# Altium PCB PowerMergeBoard.PcbDoc
Units mil, origin at the board's own origin, x right, y up, seen from the top; angles counter-clockwise.
Board outline 3659.71 x 2810 mil, 4 copper layers (Top Layer, Signal Layer 1, Internal Plane 1, Bottom Layer), stack 30.634 mil thick; 97 components, 47 nets, 440 pads, 400 vias.
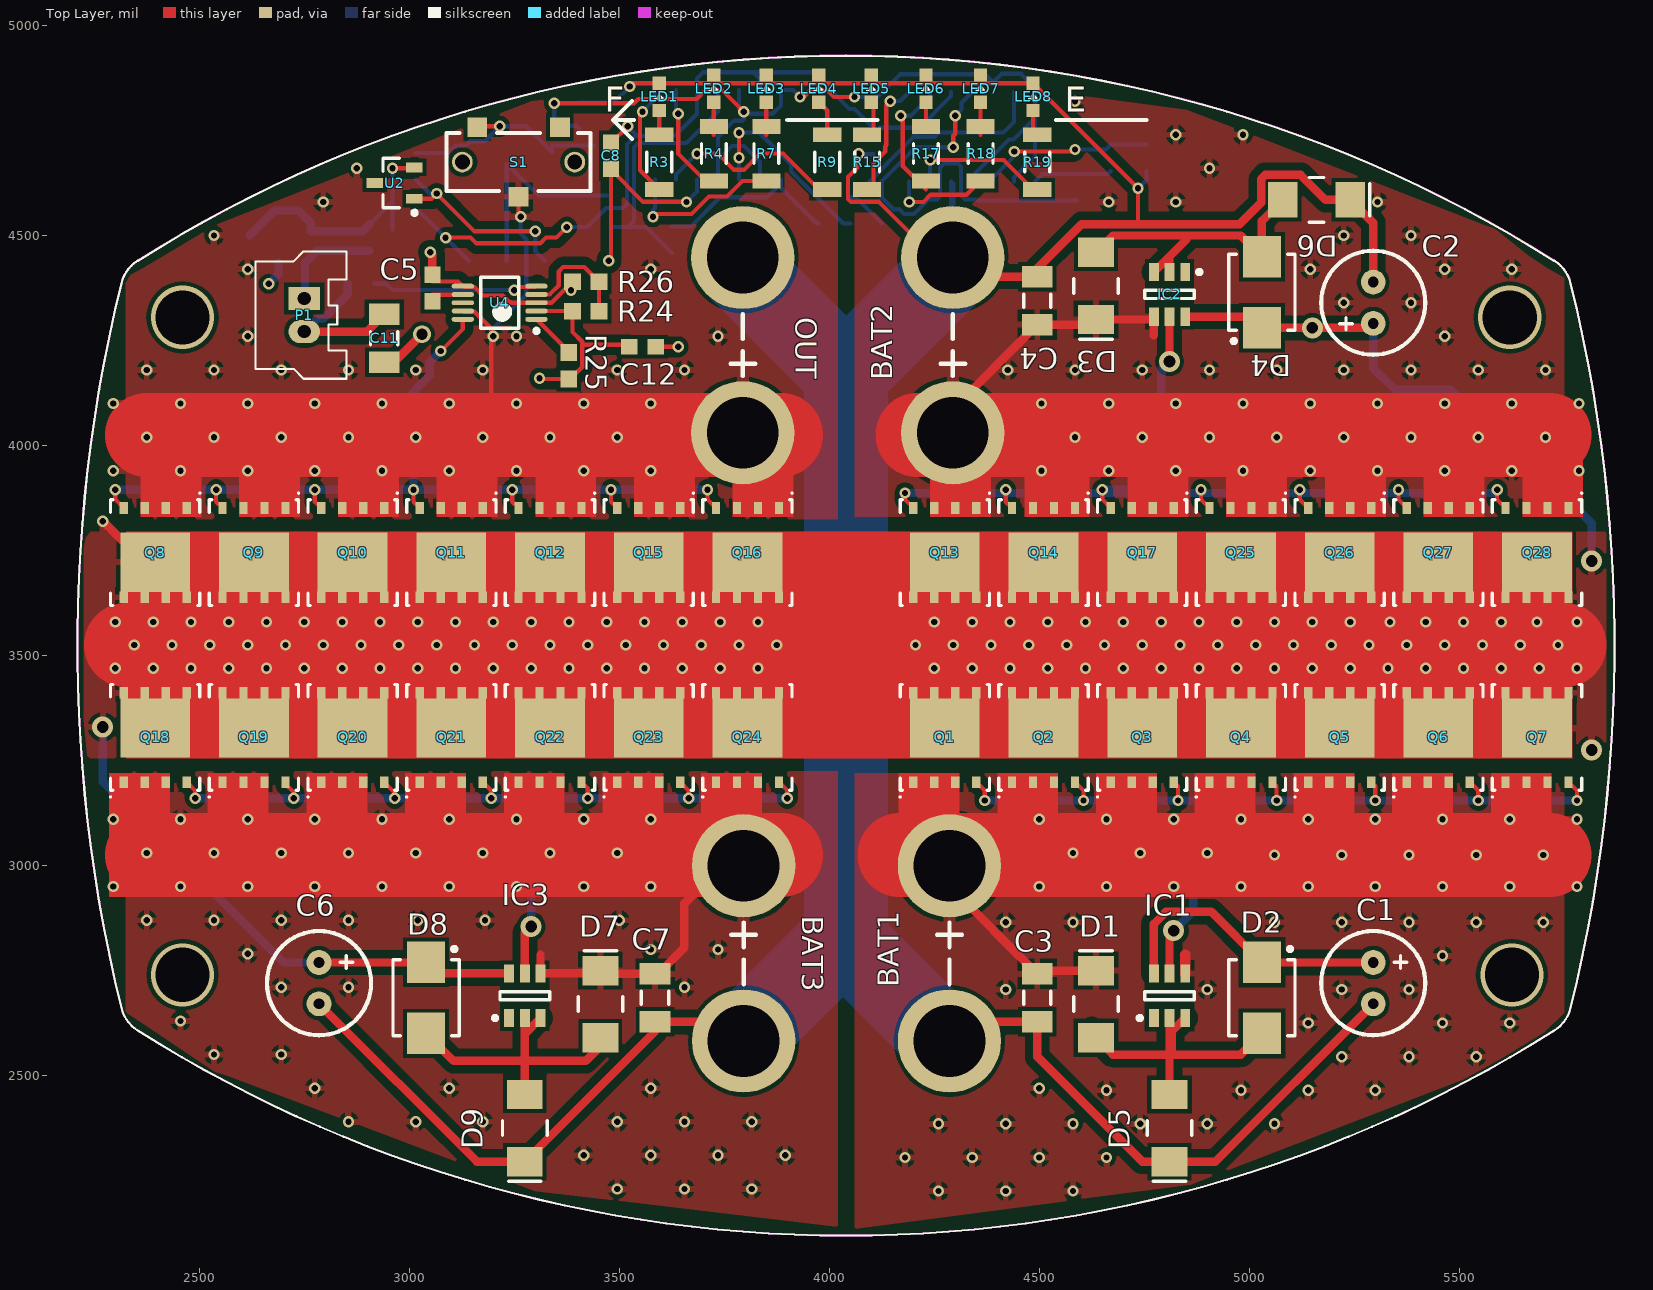
[diagram p0: Top Layer view]
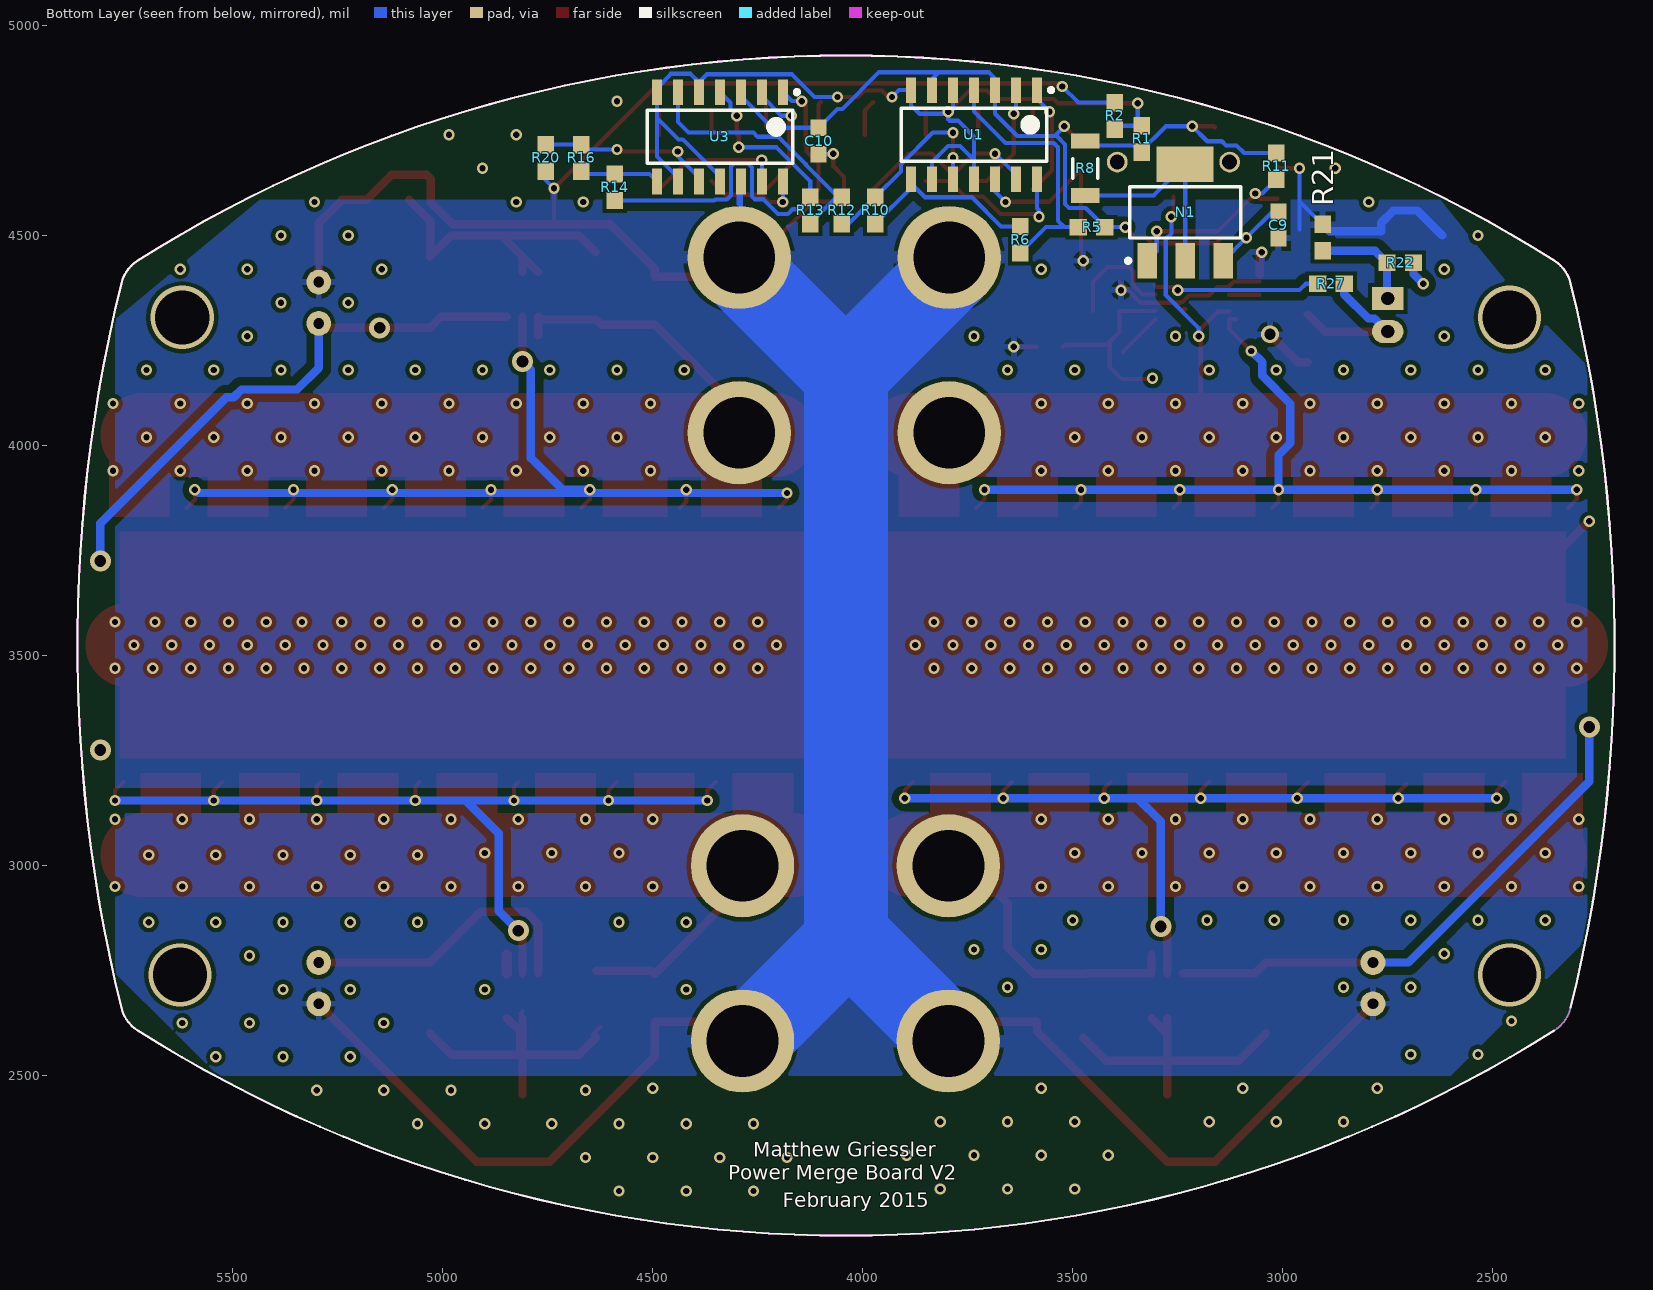
[diagram p1: Bottom Layer view, seen from below]
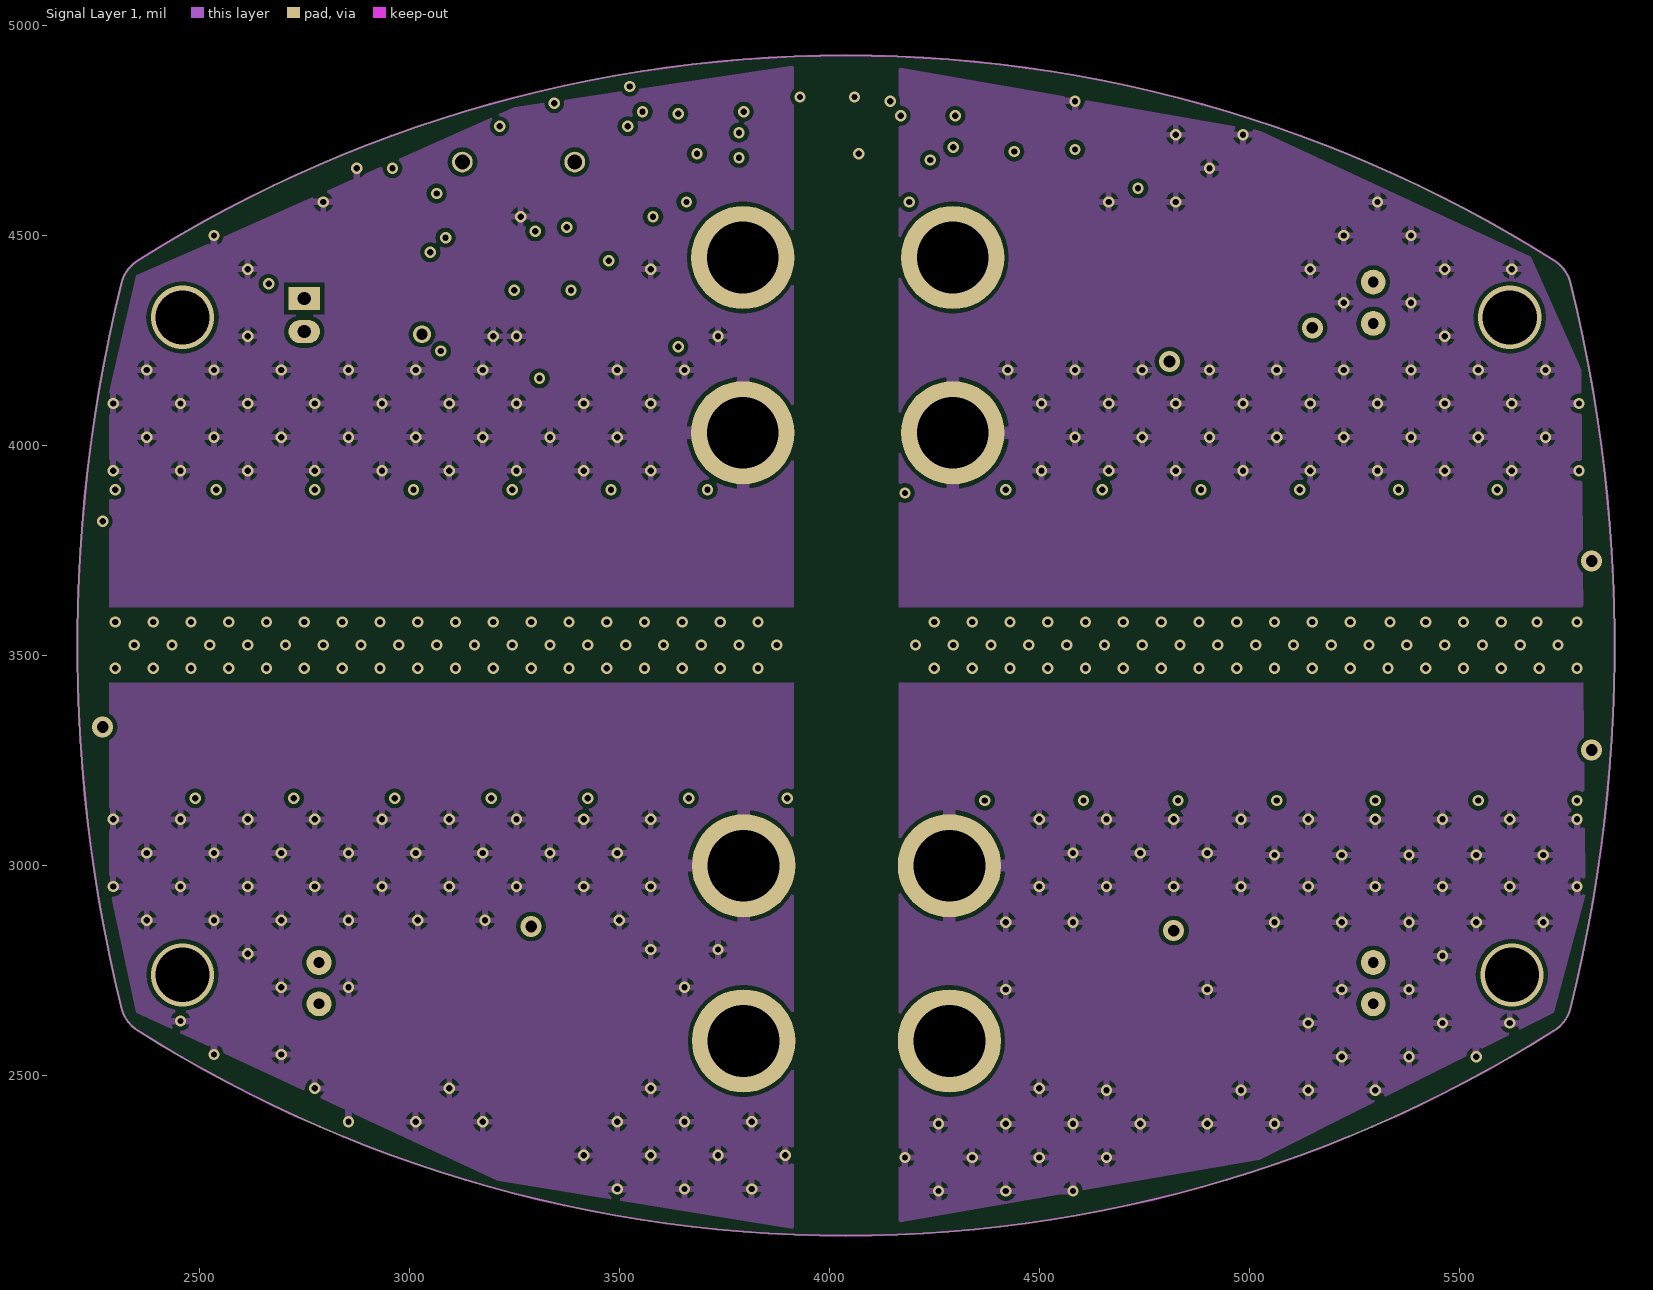
[diagram p2: Signal Layer 1]
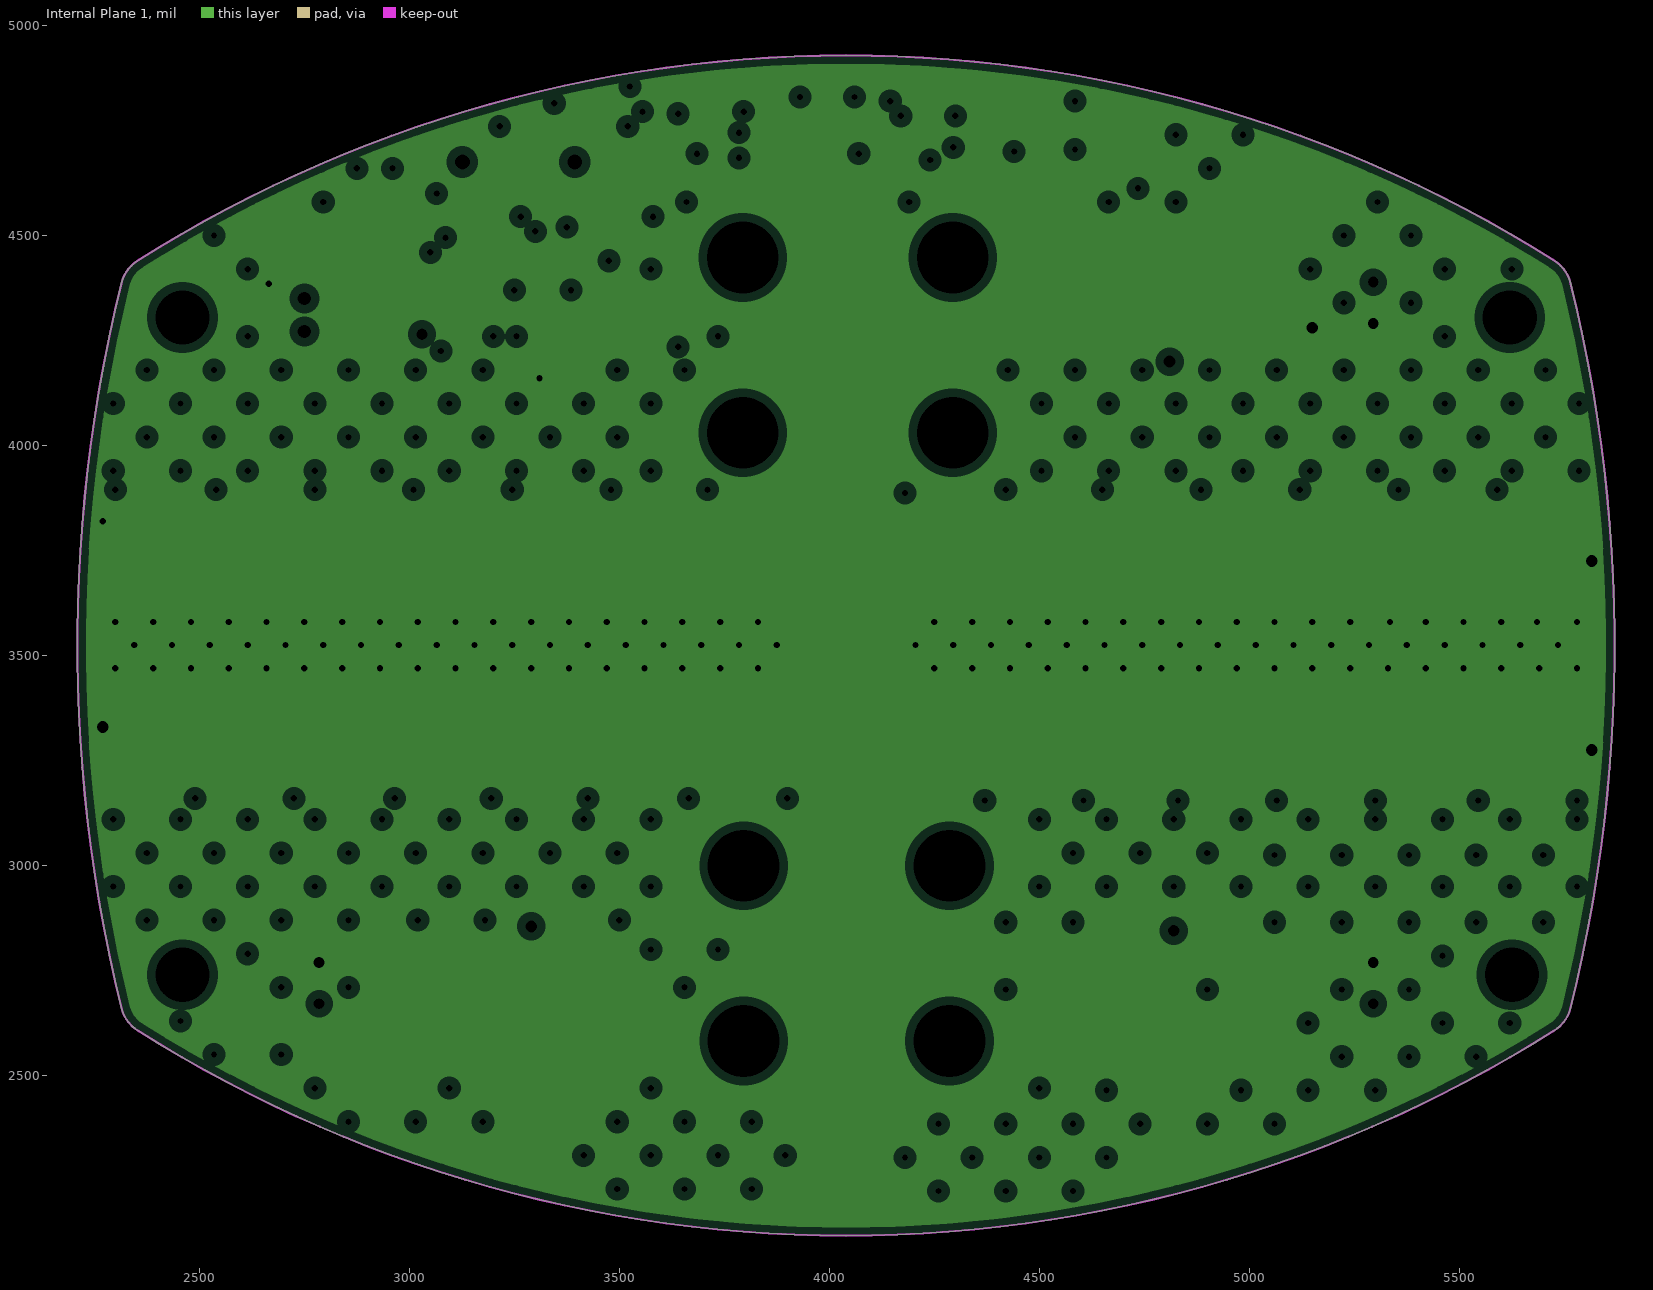
[diagram p3: Internal Plane 1, clearances drawn from the general rule]

## Layer stack, top to bottom
Top Solder: solder mask 0.4, Solder Resist, Dk 3.5
Top Layer: signal copper 1.4
Dielectric 1: core 10, FR-4, Dk 4.2
Signal Layer 1: signal copper 1.417
Dielectric 4: prepreg 5, Dk 4.2
Internal Plane 1: plane copper 1.417, net RAIL+
Dielectric 3: core 10, Dk 4.2
Bottom Layer: signal copper 1.4
Bottom Solder: solder mask 0.4, Solder Resist, Dk 3.5

## Board outline
2314.27,2661.67 cw(c5814.67,3523.79) 2314.27,4385.9 cw(c2401.66,4364.37) 2353.56,4440.44 cw(c4039.67,1773.79) 5725.78,4440.44 cw(c5677.68,4364.37) 5765.07,4385.9 cw(c2264.67,3523.79) 5765.07,2661.67 cw(c5677.68,2683.2) 5725.78,2607.13 cw(c4039.67,5273.79) 2353.56,2607.13 cw(c2401.66,2683.2)

## Design rules (kind name [scope] priority, off if disabled: settings)
Clearance [All] p1: gap=10 except(5: Arc-Track Arc-Poly SMDPad-SMDPad; 7: Track-Track Track-SMDPad; 20: Track-Poly)
HoleSize [All] p1: absolutevalues=TRUE maxlimit=171 minlimit=1 maxpercent=80.000 minpercent=20.000
MinimumAnnularRing [All] p1: minimumring=5
MinimumSolderMaskSliver [All] p1: minsoldermaskwidth=4
PlaneClearance [All] p1: clearance=20
PlaneConnect [All] p1: planeconnectstyle=Relief reliefexpansion=10 reliefentries=4 reliefconductorwidth=20 reliefairgap=10
PolygonConnect [HasFootprint('BATWIRE10')] p1: connectstyle=Relief reliefconductorwidth=30 reliefentries=4 polygonreliefangle="90 Angle" airgapwidth=10
PolygonConnect PolygonConnect_1 [All] p2: connectstyle=Relief reliefconductorwidth=15 reliefentries=4 polygonreliefangle="90 Angle" airgapwidth=10
RoutingVias [All] p1: holewidth=28 width=50 viastyle="Through Hole" minholewidth=15 minwidth=27 maxholewidth=28 maxwidth=50
SilkToSilkClearance [All] p1: silktosilkclearance=0
SilkToSolderMaskClearance [IsPad] p1: minsilkscreentomaskgap=5 clearancetoexposedcopper=TRUE
SolderMaskExpansion RailMask [(InNet('RAILOUT') OR InNet('Rail+') OR InNet('BAT1') OR InNet('BAT2') OR InNet('BAT3'))] p1: expansion=-5
SolderMaskExpansion [All] p2: expansion=4
Width Gnd [InNet('GND')] p1: maxlimit=200 minlimit=10 preferedwidth=10
Width RailOut [InNet('RAILOUT')] p2: maxlimit=200 minlimit=10 preferedwidth=200
Width Rail [InNet('RAIL+')] p3: maxlimit=200 minlimit=10 preferedwidth=200
Width Bat [(InNet('BAT1') OR InNet('BAT2') OR InNet('BAT3'))] p4: maxlimit=200 minlimit=10 preferedwidth=200
Width [All] p5: maxlimit=20 minlimit=10 preferedwidth=10
24 further rules are at their usual default settings.

## Classes and differential pairs
component class Battery3: C6 C7 D7 D8 D9 IC3 Q18 Q19 Q20 Q21 Q22 Q23 Q24
component class Battery2: C2 C4 D3 D4 D6 IC2 Q13 Q14 Q17 Q25 Q26 Q27 Q28
component class Battery1: C1 C3 D1 D2 D5 IC1 Q1 Q2 Q3 Q4 Q5 Q6 Q7
component class PowerMergeBoard: BAT1 BAT2 BAT3 C5 C11 C12 OUT P1 Q8 Q9 Q10 Q11 Q12 Q15 Q16 R21 R22 R24 R25 R26 R27 U4
component class FuelGauge: C8 C9 C10 LED1 LED2 LED3 LED4 LED5 LED6 LED7 LED8 N1 R1 R2 R3 R4 R5 R6 R7 R8 R9 R10 R11 R12 R13 R14 R15 R16 R17 R18 R19 R20 S1 U1 U2 U3

## Components (designator, comment, footprint, x,y, rotation, side; value= is the part's Value field where it differs from the comment)
BAT1 "BATWIRE" BATWIRE10 4285,2790 r270 top
BAT2 "BATWIRE" BATWIRE10 4295,4240 r90 top
BAT3 "BATWIRE" BATWIRE10 3795,2790 r270 top
C1 "CapPol" CAP22uF100V 5295,2720 r270 top
C2 "CapPol" CAP22uF100V 5295,4340 r90 top
C3 "Cap" CAPC1206 4495,2685 r270 top
C4 "Cap" CAPC1206 4495,4345 r90 top
C5 "Cap" CAPC0603 3055,4375 r90 top
C6 "CapPol" CAP22uF100V 2785,2720 r270 top
C7 "Cap" CAPC1206 3585,2685 r270 top
C8 "Cap" CAPC0603 3480,4690 r270 top
C9 "Cap" CAPC0603 3010,4525 r270 bottom
C10 "Cap" CAPC0603 4105,4725 r270 bottom
C11 "Cap" CAPC1206 2940,4255 r270 top
C12 "Cap" CAPC0603 3555,4235 r180 top
D1 "Schottky" SS110-TP 4635,2670 r270 top
D2 "SMBJ100A-13-F" SMBJ100A-13-F 5030,2685 r270 top
D3 "Schottky" SS110-TP 4635,4380 r90 top
D4 "SMBJ100A-13-F" SMBJ100A-13-F 5030,4365 r90 top
D5 "Schottky" SS110-TP 4810,2375 r90 top
D6 "Schottky" SS110-TP 5160,4585 r180 top
D7 "Schottky" SS110-TP 3455,2670 r270 top
D8 "SMBJ100A-13-F" SMBJ100A-13-F 3040,2685 r270 top
D9 "Schottky" SS110-TP 3275,2375 r90 top
IC1 "LM5050MK-2/NOPB" LM5050MK-2/NOPB 4810,2690 r90 top
IC2 "LM5050MK-2/NOPB" LM5050MK-2/NOPB 4810,4360 r270 top
IC3 "LM5050MK-2/NOPB" LM5050MK-2/NOPB 3275,2690 r90 top
LED1 "LED" LED0603 3595,4830 r90 top
LED2 "LED" LED0603 3725,4850 r90 top
LED3 "LED" LED0603 3850,4850 r90 top
LED4 "LED" LED0603 3975,4850 r90 top
LED5 "LED" LED0603 4100,4850 r90 top
LED6 "LED" LED0603 4230,4850 r90 top
LED7 "LED" LED0603 4360,4850 r90 top
LED8 "LED" LED0603 4485,4830 r90 top
N1 "NPNBJT" PZT3904 3232.05,4555 r90 bottom
OUT "BATWIRE" BATWIRE10 3795,4240 r90 top
P1 "2-pin Vert Sherlock" MOLEX-HDR-1X2-SHERLOCK-VERT 2750,4350 r90 top
Q1 "CSD19502Q5B" CSD19502Q5B 4275,3305 r90 top
Q2 "CSD19502Q5B" CSD19502Q5B 4510,3305 r90 top
Q3 "CSD19502Q5B" CSD19502Q5B 4745,3305 r90 top
Q4 "CSD19502Q5B" CSD19502Q5B 4980,3305 r90 top
Q5 "CSD19502Q5B" CSD19502Q5B 5215,3305 r90 top
Q6 "CSD19502Q5B" CSD19502Q5B 5450,3305 r90 top
Q7 "CSD19502Q5B" CSD19502Q5B 5685,3305 r90 top
Q8 "CSD19502Q5B" CSD19502Q5B 2395,3745 r270 top
Q9 "CSD19502Q5B" CSD19502Q5B 2630,3745 r270 top
Q10 "CSD19502Q5B" CSD19502Q5B 2865,3745 r270 top
Q11 "CSD19502Q5B" CSD19502Q5B 3100,3745 r270 top
Q12 "CSD19502Q5B" CSD19502Q5B 3335,3745 r270 top
Q13 "CSD19502Q5B" CSD19502Q5B 4275,3745 r270 top
Q14 "CSD19502Q5B" CSD19502Q5B 4510,3745 r270 top
Q15 "CSD19502Q5B" CSD19502Q5B 3570,3745 r270 top
Q16 "CSD19502Q5B" CSD19502Q5B 3805,3745 r270 top
Q17 "CSD19502Q5B" CSD19502Q5B 4745,3745 r270 top
Q18 "CSD19502Q5B" CSD19502Q5B 2395,3305 r90 top
Q19 "CSD19502Q5B" CSD19502Q5B 2630,3305 r90 top
Q20 "CSD19502Q5B" CSD19502Q5B 2865,3305 r90 top
Q21 "CSD19502Q5B" CSD19502Q5B 3100,3305 r90 top
Q22 "CSD19502Q5B" CSD19502Q5B 3335,3305 r90 top
Q23 "CSD19502Q5B" CSD19502Q5B 3570,3305 r90 top
Q24 "CSD19502Q5B" CSD19502Q5B 3805,3305 r90 top
Q25 "CSD19502Q5B" CSD19502Q5B 4980,3745 r270 top
Q26 "CSD19502Q5B" CSD19502Q5B 5215,3745 r270 top
Q27 "CSD19502Q5B" CSD19502Q5B 5450,3745 r270 top
Q28 "CSD19502Q5B" CSD19502Q5B 5685,3745 r270 top
R1 "Res" RES0603 3335,4730 r90 bottom
R2 "Res" RES0603 3400,4785 r90 bottom
R3 "Res" RES1206 3595,4675 r90 top
R4 "Res" RES1206 3725,4695 r90 top
R5 "Res" RES0603 3455,4520 r0 bottom
R6 "Res" RES0603 3625,4490 r90 bottom
R7 "Res" RES1206 3850,4695 r90 top
R8 "Res" RES1206 3470,4660 r90 bottom
R9 "Res" RES1206 3995,4675 r90 top
R10 "Res" RES0603 3970,4560 r90 bottom
R11 "Res" RES0603 3015,4665 r270 bottom
R12 "Res" RES0603 4050,4560 r90 bottom
R13 "Res" RES0603 4125,4560 r90 bottom
R14 "Res" RES0603 4590,4615 r90 bottom
R15 "Res" RES1206 4090,4675 r90 top
R16 "Res" RES0603 4670,4685 r90 bottom
R17 "Res" RES1206 4230,4695 r90 top
R18 "Res" RES1206 4360,4695 r90 top
R19 "Res" RES1206 4495,4675 r90 top
R20 "Res" RES0603 4755,4685 r270 bottom
R21 "Res" RES0603 2905,4495 r90 bottom
R22 "Res" RES0603 2720,4435 r0 bottom
R24 "Res" RES0603 3420,4320 r0 top
R25 "Res" RES0603 3380,4190 r90 top
R26 "Res" RES0603 3420,4390 r180 top
R27 "Res" RES0603 2885,4385 r0 bottom
S1 "SPDT Slide Switch" CL-SB-12B-01T 3260,4675 r180 top
U1 "LM339" LM339 3735,4740 r270 bottom
U2 "LM4040" LM4040 2965,4625 r180 top
U3 "LM339" LM339 4340,4735 r270 bottom
U4 "LM5060" LM5060 3215,4340 r180 top

## Footprints (in the part's own frame and the unit in brackets; to place one, negate y for a bottom-side part, rotate by r counter-clockwise, add the part's x,y. Pads: shape width x height; smd on the part's side, far side on the other; paste and mask are expansions set on the pad)
BATWIRE10 [mil] "Two 10AWG wires soldered directly to the board"
  round 246 hole 171: +(-209.65,0.98) -(207.68,0.98)
  silkscreen extent -75,-29 73,31
CAP22uF100V [mm] "CAP ALUM 22UF 100V 20% RADIAL"
  round 1.5 hole 0.65: 1(-1.25,0) 2(1.25,0)
  silkscreen extent -3.15,-3.15 3.15,3.15, body extent -3.13,-3.14 3.15,3.14, height 11.2
CAPC0603 [mm] "Chip Capacitor, 2-Leads, Body 1.60x0.80mm, IPC Medium Density"
  rect 1x0.95 smd: 1(-0.8,0) 2(0.8,0)
  body extent -0.88,-0.48 0.87,0.48, height 0.8
CAPC1206 [mm] "Chip Capacitor, 2-Leads, Body 3.20x1.60mm, IPC Medium Density"
  rect 1.3x1.85 smd: 1(-1.45,0) 2(1.45,0)
  silkscreen extent -0.4,-0.82 0.4,0.82, body extent -1.7,-0.9 1.7,0.9, height 1.8
CL-SB-12B-01T [mm] "SWITCH SLIDE SPDT 200MA 12V"
  round 1.256 hole 0.9 paste+0 mask+0: 0(-3.4,0) 0(3.4,0)
  rect 1.2x1.2 smd: 1(-2.5,-2.1) 2(0,2.1) 3(2.5,-2.1)
  silkscreen extent -4.35,-1.75 4.35,1.75, body extent -4.25,-2.5 4.25,2.5, height 5.5
CSD19502Q5B [mm] "PSON, 8-Leads, Body 5.00x6.00mm, Pitch 1.27mm, Thermal Pad 4.22x3.58mm, IPC Medium Density"
  rect 3.58x4.22 smd mask+0: D(0.575,0)
  rect 0.7x0.5 smd mask+0: D(2.7,-1.905) D(2.7,-0.635) D(2.7,0.635) D(2.7,1.905) G(-2.7,-1.905) S(-2.7,-0.635) S(-2.7,0.635) S(-2.7,1.905)
  silkscreen extent -3.65,-2.7 3.2,2.75, body extent -3.05,-2.55 3.05,2.55, height 1.05
LED0603 [mm] "Chip LED, 2-Leads, Body 1.60x0.80mm, IPC Medium Density"
  rect 0.8x0.8 smd: A(-0.825,0) C(0.825,0)
  silkscreen extent -0.13,-0.25 0.12,0.25, body extent -0.88,-0.48 0.87,0.47, height 0.8
LM339 [mm] "SOIC, 14-Leads, Body 8.65x3.90mm, Pitch 1.27mm, IPC Medium Density"
  rect 1.55x0.6 smd: 1(-2.7,3.81) 2(-2.7,2.54) 3(-2.7,1.27) 4(-2.7,0) 5(-2.7,-1.27) 6(-2.7,-2.54) 7(-2.7,-3.81) 8(2.7,-3.81) 9(2.7,-2.54) 10(2.7,-1.27) 11(2.7,0) 12(2.7,1.27) 13(2.7,2.54) 14(2.7,3.81)
  silkscreen extent -2.82,-4.4 1.6,4.78, body extent -2,-4.4 2,4.4, height 1.75
LM4040 [mm] "SOT23, 3-Leads, Body 2.92x2.37mm, Pitch 0.95mm, IPC Medium Density"
  rect 1x0.6 smd: 1(-1.2,0.95) 2(-1.2,-0.95) 3(1.2,0)
  silkscreen extent -1.33,-1.5 0.7,1.92, body extent -0.7,-1.52 0.7,1.52, height 1.12
LM5050MK-2/NOPB [mm] "IC OR CTRLR N+1 6SOT"
  rect 1.1x0.6 smd: 1(-1.35,0.95) 2(-1.35,0) 3(-1.35,-0.95) 4(1.35,-0.95) 5(1.35,0) 6(1.35,0.95)
  silkscreen extent -1.47,-1.5 0.25,1.92, body extent -0.87,-1.52 0.87,1.53, height 1.1
LM5060 [mm] "10-VSSOP"
  oval 1.35x0.3 smd: 1(-2.225,1) 2(-2.225,0.5) 3(-2.225,0) 4(-2.225,-0.5) 5(-2.225,-1) 6(2.225,-1) 7(2.225,-0.5) 8(2.225,0) 9(2.225,0.5) 10(2.225,1)
  silkscreen extent -2.35,-1.55 1.15,1.82, body extent -1.55,-1.55 1.55,1.55, height 1.1
MOLEX-HDR-1X2-SHERLOCK-VERT [mm]
  rect 1.397x1.905 hole 0.8: 1(0,0)
  oval 1.397x1.905 hole 0.8: 2(-2,0)
  silkscreen extent -4.85,-2.55 2.85,2.95, body extent -4.87,-2.59 2.83,2.96, height 8.5
PZT3904 [mm] "SOT223, 4-Leads, Body 6.45x7.00mm (avg), Pitch 2.30mm, IPC Medium Density"
  rect 2.15x1.2 smd: B(-2.925,2.3) C(-2.925,0) E(-2.925,-2.3)
  rect 2.15x3.45 smd: C(2.925,0)
  silkscreen extent -3.05,-3.35 1.55,3.58, body extent -1.85,-3.35 1.85,3.35, height 1.8
RES0603 [mm] "Chip Resistor, 2-Leads, Body 1.60x0.80mm, IPC Medium Density"
  rect 1.05x1 smd: 1(-0.8,0) 2(0.8,0)
  body extent -0.88,-0.48 0.87,0.47, height 0.8
RES1206 [mm] "Chip Resistor, 2-Leads, Body 3.20x1.60mm, IPC Medium Density"
  rect 0.9x1.7 smd: 1(-1.65,0) 2(1.65,0)
  silkscreen extent -0.6,-0.75 0.6,0.75, body extent -1.73,-0.87 1.73,0.88, height 0.7
SMBJ100A-13-F [mm] "TVS DIODE 100VWM 162VC SMB"
  rect 2.5x2.3 smd: A(2.15,0) C(-2.15,0)
  silkscreen extent -3.07,-2 2.3,2, body extent -2.29,-1.97 2.28,1.97, height 2.62
SS110-TP [mil] "DIODE SCHOTTKY 100V 1A SMA"
  rect 70x85 smd: A(80,0) C(-80,0)
  silkscreen extent -127,-53 18,53, body extent -84,-52 84,52, height 116

## Part data
BAT1 BAT2 BAT3 OUT: "Two large gauge leads soldered directly to the board."
D1 D3 D5 D6 D7 D9: "Schottky Diode Template"
D2 D4 D8: "TVS DIODE 100VWM 162VC SMB"
IC1 IC2 IC3: "IC OR CTRLR N+1 6SOT"
N1: "NPN Transistor Template"
P1: library part MOLEX-HDR-1x2-SHERLOCK_VERT, "Header, Molex, 2mm Pitch Sherlock Header, Single Row, Vertical, 2 Circuits, Length 3.3mm, 0353620250"
Q1 Q2 Q3 Q4 Q5 Q6 Q7 Q8 Q9 Q10 Q11 Q12 Q13 Q14 Q15 Q16 Q17 Q18 Q19 Q20 Q21 Q22 Q23 Q24 Q25 Q26 Q27 Q28: "NEXFET Power MOSFET"
U1 U3: "IC QUAD DIFF COMPARATOR 14-TSSOP"
U2: "LM4040AIM3-10.0/NOPBCT"
U4: "Hotswap Controller"

## Via types
v1: diameter 27, hole 15, Top Layer to Bottom Layer, tented bottom, 215 vias
v2: diameter 27, hole 15, Top Layer to Bottom Layer, tented both sides, 173 vias
v3: diameter 50, hole 28, Top Layer to Bottom Layer, tented both sides, 7 vias
v4: diameter 150, hole 129, Top Layer to Bottom Layer, 2 vias
v5: diameter 151, hole 129, Top Layer to Bottom Layer, 2 vias
v6: diameter 42, hole 27, Top Layer to Bottom Layer, tented both sides, 1 vias

## Nets (pads, with @x,y where several pads share a name; then routed paths per layer and width w, separated by ;. In a path a pad name is that pad's centre, name@x,y a point inside that pad or via, vN(x,y) a via of type N, cw(c..) or ccw(c..) an arc to the next point about the centre after c; other vN are vias at no path point)
BAT1: BAT1.+ C3.1 D1.C IC1.4 Q1.S Q2.S Q3.S Q4.S Q5.S Q6.S Q7.S | length 2110.5
  Top Layer w20: BAT1.+@4285,3030 4285,2952.09 C3.1 4502.91,2750 D1.C
  Top Layer w25: IC1.4 4847.4,2787.6
  Top Layer w200: BAT1.+@4167.11,3025 5715,3025
  other v1: 4500,2950 4660,2950 4820,2950 4980,2950 5140,2950 5300,2950 5460,2950 5620,2950 5780,2950 5060,3025 5220,3025 5380,3025 5540,3025 5700,3025 4580,3030 4740,3030 4900,3030 4500,3110 4660,3110 4820,3110 4980,3110 5140,3110 5300,3110 5460,3110 5620,3110 5780,3110
  other v2: 4260,2225 4420,2225 4580,2225 4180,2305 4340,2305 4500,2305 4660,2305 4260,2385 4420,2385 4580,2385 4740,2385 4900,2385 5060,2385 4660,2465 4980,2465 5140,2465 5300,2465 4500,2470 5220,2545 5380,2545 5540,2545 5140,2625 5460,2625 5620,2625 4420,2705 4900,2705 5220,2705 5380,2705 5460,2785 4420,2865 4580,2865 5060,2865 5220,2865 5380,2865 5540,2865 5700,2865
BAT2: BAT2.+ C4.1 D3.C IC2.4 Q13.S Q14.S Q17.S Q25.S Q26.S Q27.S Q28.S | length 2189.8
  Top Layer w20: BAT2.+@4285,4020 4285,4077.91 C4.1 4622.91,4287.91 D3.C 4765.75,4300 IC2.4 4772.6,4262.4
  Top Layer w200: BAT2.+@4210,4025 v1@5715,4025
  other v1: 4505,3940 4665,3940 4825,3940 4985,3940 5145,3940 5305,3940 5465,3940 5625,3940 5785,3940 4585,4020 4745,4020 4905,4020 5065,4020 5225,4020 5385,4020 5545,4020 5705,4020 4505,4100 4665,4100 4825,4100 4985,4100 5145,4100 5305,4100 5465,4100 5625,4100 5785,4100
  other v2: 4425,4180 4585,4180 4745,4180 4905,4180 5065,4180 5225,4180 5385,4180 5545,4180 5705,4180 5465,4260 5225,4340 5385,4340 5145,4420 5465,4420 5625,4420 5225,4500 5385,4500 4665,4580 4825,4580 5305,4580 4905,4660 4825,4740 4985,4740 4585,4820
BAT3: BAT3.+ C7.1 D7.C IC3.4 Q18.S Q19.S Q20.S Q21.S Q22.S Q23.S Q24.S | length 2205.3
  Top Layer w20: 3312.4,2787.6 IC3.4 3468.15,2743.15 3469.21,2742.09 C7.1 3592.09,2742.09 3655,2805 3655,2910 BAT3.+@3780,3035
  Top Layer w200: v1@2375,3025 BAT3.+@3885,3025
  other v1: 2295,2950 2455,2950 2615,2950 2775,2950 2935,2950 3095,2950 3255,2950 3415,2950 3575,2950 2375,3030 2535,3030 2695,3030 2855,3030 3015,3030 3175,3030 3335,3030 3495,3030 2295,3110 2455,3110 2615,3110 2775,3110 2935,3110 3095,3110 3255,3110 3415,3110 3575,3110
  other v2: 3495,2230 3655,2230 3815,2230 3415,2310 3575,2310 3735,2310 3895,2310 2855,2390 3015,2390 3175,2390 3495,2390 3655,2390 3815,2390 2775,2470 3095,2470 3575,2470 2535,2550 2695,2550 2455,2630 2695,2710 2855,2710 3655,2710 2615,2790 3575,2800 3735,2800 2375,2870 2535,2870 2695,2870 2855,2870 3020,2870 3180,2870 3500,2870
ENABLE: R27.2 U4.5 | length 399.6
  Top Layer w10: v2(3250,4370) 3257.59,4377.59 3300.82,4377.59 U4.5 U4.5@3305,4381.77
  Bottom Layer w10: R27.2 2945,4385 2960,4370 v2(3250,4370)
GAUGEPOWER: R1.1 R8.2 R11.1 S1.3 | length 546.3
  Top Layer w10: S1.3 3163.9,4760 v2(3215,4760)
  Bottom Layer w10: R11.1 3091.47,4696.5 3109.69,4714.72 3135.24,4714.72 3145,4724.48 3179.48,4724.48 v2(3215,4760) 3278.5,4760 3340,4698.5 3340,4714.72 R8.2@3438.94,4714.72
GND: BAT1.- BAT2.- BAT3.- C1.2 C2.2 C3.2 C4.2 C5.2 C6.2 C7.2 C8.2 C9.2 C10.2 C11.2 C12.1 D5.C D6.C D9.C LED1.C LED2.C LED3.C LED4.C LED5.C LED6.C LED7.C LED8.C OUT.- R2.2 R20.2 R21.2 R26.2 U1.12 U2.2 U3.12 U4.3 U4.6 | length 10667
  Top Layer w10: v2(2960,4660) 3009.84,4660 U2.2 ; C5.2@3055,4390.75 3116.02,4390.75 U4.6 3129.18,4377.59 3155.49,4377.59 3165.98,4367.1 3165.98,4366.02 3175,4357 3222.7,4357 3238.2,4341.5 3242.54,4341.5 3244.04,4340 U4.3 3338.5,4340 R26.2 ; v1(3475,4440) 3480,4445 C8.2@3480,4656.89 ; C8.2 C8.2@3480,4656.89 ; v2(3525,4855) 3532.48,4862.48 LED1.C LED8.C v2(4735,4612.48) 4735,4527 ; C12.1 v2(3640,4235) ; v2(3660,4580) 3659.68,4580.32 3556.56,4580.32 C8.2@3480,4656.89 ; v2(4070,4695) 4070,4665.22 4044.54,4639.76 4044.54,4587.35 4051.56,4580.32 4118.38,4580.32 BAT2.-@4285,4413.7
  Top Layer w20: C6.2 3160.79,2295 D9.C 3585,2605 C7.2 3778.39,2627.91 BAT3.-@3795,2611.3 ; C11.2 2962.91,4197.91 v6(3030,4265) ; v2(3050,4460) 3055,4455 C5.2 ; v1(3475,4440) v1@3475,4441.5 ; BAT1.-@4285,2636.3 4293.39,2627.91 C3.2 4495,2545 4745,2295 D5.C 4919.21,2295 C1.2 ; BAT2.-@4285,4413.7 4296.61,4402.09 C4.2 4495,4421.54 4600.46,4527 4735,4527 4977,4527 5028,4578 5028,4634.54 5037.96,4644.5 5122.04,4644.5 5181.54,4585 D6.C 5295,4530 C2.2
  Bottom Layer w10: R21.2 2960,4581.5 ; 2960,4515 2960,4581.5 ; v2(2960,4660) 2960,4581.5 ; R2.2@3405,4816.5 3486.5,4816.5 v2(3525,4855) ; v2(3660,4580) 3685,4605 U1.12 ; v2(4070,4695) 4071.5,4693.5 C10.2 ; BAT2.-@4294.02,4563.5 4290,4567.52 U3.12 4295,4623.7 4295,4575 ; v2(4735,4612.48) 4755,4632.48 R20.2
  Bottom Layer w20: 2620,4500 2679.53,4559.53 2736.3,4559.53 2765.32,4530.52 2765.32,4510 2888.5,4510 R21.2
  Bottom Layer w200: BAT3.-@3795,2580 3795,2590 4040,2835 ; OUT.-@3795,4413.7 4040,4168.7 ; BAT1.-@4280,2580 4040,2820 4040,4168.7 ; BAT2.-@4285,4413.7 4040,4168.7
  other v1: 3385,4370
NetC5_1: C5.1 U4.7 | length 72.6
  Top Layer w10: C5.1@3055,4359.25 3126.97,4359.25 U4.7
NetC11_1: C11.1 P1.2 R27.1 | length 372
  Top Layer w20: P1.2 2899.17,4271.26 C11.1
  Bottom Layer w20: P1.2 2781.24,4302.5 2795.78,4302.5 2853.5,4360.22 R27.1
NetD1_A: D1.A D2.A D5.A IC1.2 IC1.3 | length 743.7
  Top Layer w10: D1.A@4625,2615.35 D1.A@4642.68,2597.68 ; IC1.2@4810,2651.85 IC1.2@4815,2646.85
  Top Layer w20: D1.A 4675,2550 4810,2550 IC1.2 ; D5.A 4810,2545 4815,2550 ; IC1.3 4815,2604.45 4815,2550 ; D2.A 4979.65,2550 4815,2550
NetD3_A: D3.A D4.A D6.A IC2.2 IC2.3 | length 744.8
  Top Layer w20: D3.A 4675,4500 4850,4500 ; IC2.3 4810,4450.55 ; IC2.2 4810,4450.55 ; D6.A 5030,4535 D4.A 4979.65,4500 4850,4500 ; 4810,4450.55 4850,4490.55 4850,4500
NetD7_A: D7.A D8.A D9.A IC3.2 IC3.3 | length 719.6
  Top Layer w20: D8.A 3105.35,2535 3275,2535 ; D9.A 3275,2535 ; IC3.2 3275,2599.45 ; IC3.3 3275,2599.45 ; D7.A@3475,2590 3420,2535 3275,2535 ; 3275,2535 3275,2599.45
NetIC1_5: IC1.5 Q1.G Q2.G Q3.G Q4.G Q5.G Q6.G Q7.G | length 2205.1
  Top Layer w10: Q1.G 4370,3178.7 v2(4370,3155) ; Q2.G 4605,3178.7 v2(4605,3155) ; Q3.G 4830,3188.7 v2(4830,3155) ; Q4.G 5065,3188.7 v2(5065,3155) ; Q5.G 5300,3188.7 v2(5300,3155) ; Q6.G 5545,3178.7 v2(5545,3155) ; Q7.G 5780,3178.7 v2(5780,3155)
  Top Layer w20: IC1.5 v3@4810,2825
  Bottom Layer w20: v2(4370,3155) v2(4605,3155) v2(4830,3155) 4945,3155 ; v3(4820,2845) 4866.5,2891.5 4866.5,3076.5 4945,3155 ; v2(5780,3155) v2(5545,3155) v2(5300,3155) v2(5065,3155) 4945,3155
NetIC2_5: IC2.5 Q13.G Q14.G Q17.G Q25.G Q26.G Q27.G Q28.G | length 2283.3
  Top Layer w10: v2(4180,3887) 4180,3871.3 Q13.G ; v2(4420,3895) 4420,3866.3 Q14.G ; v2(4650,3895) 4650,3871.3 Q17.G ; v2(4885,3895) 4885,3871.3 Q25.G ; v2(5120,3895) 5120,3871.3 Q26.G ; v2(5355,3895) 5355,3871.3 Q27.G ; v2(5590,3895) 5590,3871.3 Q28.G
  Top Layer w20: v3(4810,4200) IC2.5
  Bottom Layer w20: v2(4180,3887) 5582,3887 v2(5590,3895) ; v2(4650,3895) 4715,3895 4790,3970 4790,4180 v3(4810,4200)
NetIC3_5: IC3.5 Q18.G Q19.G Q20.G Q21.G Q22.G Q23.G Q24.G | length 2179.7
  Top Layer w10: Q18.G 2490,3178.7 v2(2490,3160) ; Q19.G@2705,3193.7 2725,3173.7 v2(2725,3160) ; Q20.G 2965,3173.7 v2(2965,3160) ; Q21.G 3195,3178.7 v2(3195,3160) ; Q22.G 3425,3183.7 v2(3425,3160) ; Q23.G 3665,3178.7 v2(3665,3160) ; Q24.G 3900,3178.7 v2(3900,3160)
  Top Layer w20: IC3.5 3275,2840 v3(3290,2855)
  Bottom Layer w20: v2(2490,3160) v2(2725,3160) v2(2965,3160) v2(3195,3160) 3345,3160 ; v3(3290,2855) 3290,3105 3345,3160 ; v2(3900,3160) v2(3665,3160) v2(3425,3160) 3345,3160
NetLED1_A: LED1.A R3.2 | length 57.6
  Top Layer w10: R3.2 LED1.A
NetLED2_A: LED2.A R4.2 | length 57.6
  Top Layer w10: 3725,4739.96 3725,4797.52
NetLED3_A: LED3.A R7.2 | length 57.6
  Top Layer w10: 3850,4739.96 3850,4797.52
NetLED4_A: LED4.A R9.2 | length 85.8
  Top Layer w10: LED4.A 3995,4797.52 R9.2
NetLED5_A: LED5.A R15.2 | length 79.6
  Top Layer w10: LED5.A 4105,4812.52 R15.2@4105,4739.96
NetLED6_A: LED6.A R17.2 | length 57.6
  Top Layer w10: R17.2 LED6.A
NetLED7_A: LED7.A R18.2 | length 57.6
  Top Layer w10: 4360,4739.96 4360,4797.52
NetLED8_A: LED8.A R19.2 | length 57.6
  Top Layer w10: R19.2@4485,4739.96 LED8.A
NetN1_B: N1.B R11.2 U2.1 | length 473.6
  Top Layer w10: U2.1 3052.6,4587.6 v2(3065,4600) 3155,4510 v2(3300,4510)
  Bottom Layer w10: R11.2 3048.5,4600 v2(3065,4600) ; v2(3300,4510) 3300,4502.44 3300,4462.44 N1.B
NetN1_C: N1.C R8.1 | length 499.4
  Bottom Layer w10: N1.C@3232.05,4439.84 3232.05,4670.16 3307.17,4595.04 R8.1
NetP1_1: P1.1 R21.1 R22.2 | length 250.9
  Bottom Layer w20: P1.1 2751.5,4351.5 R22.2 2780,4463.5 R21.1
NetQ8_G: Q8.G Q9.G Q10.G Q11.G Q12.G Q15.G Q16.G U4.10 | length 2258.2
  Top Layer w10: v2(2300,3895) 2300,3871.3 Q8.G ; v2(2540,3895) 2540,3866.3 Q9.G ; v2(2775,3895) 2775,3866.3 Q10.G ; v2(3010,3895) 3010,3866.3 Q11.G ; v2(3075,4225) 3127.4,4277.4 U4.10 U4.10@3110.63,4300.63 ; v2(3245,3895) 3245,3866.3 Q12.G ; v2(3480,3895) 3480,3866.3 Q15.G ; v2(3710,3895) 3710,3871.3 Q16.G
  Bottom Layer w20: v2(2300,3895) v2(2540,3895) v2(2775,3895) v2(3010,3895) ; v2(3075,4225) 3048.5,4198.5 3048.5,4166.12 2981.5,4099.12 2981.5,4006.12 3010,3977.62 v2(3010,3895) ; v2(3710,3895) v2(3480,3895) v2(3245,3895) v2(3010,3895)
NetR3_1: R3.1 U1.1 | length 269.8
  Top Layer w10: v2(3555,4795) 3549.54,4789.54 3549.54,4655.5 R3.1
  Bottom Layer w10: v2(3555,4795) 3585,4825 U1.1
NetR4_1: R4.1 U1.2 | length 265.3
  Top Layer w10: v2(3640,4790) 3640.46,4789.54 3640.46,4694.57 3705,4630.04 R4.1
  Bottom Layer w10: U1.2 3635,4795 v2(3640,4790)
NetR7_1: R7.1 U1.14 | length 396
  Top Layer w10: v2(3580,4545) 3586.5,4551.5 3671.8,4551.5 3713.34,4593.04 3756.15,4593.04 3793.15,4630.04 R7.1
  Bottom Layer w10: v2(3580,4545) 3580,4560 3585,4565 U1.14
NetR9_1: R9.1 U1.13 | length 439.1
  Top Layer w10: v2(3685,4695) 3734.7,4695 3773.2,4656.5 3796.8,4656.5 3835.3,4695 3890.04,4695 R9.1@3975,4610.04
  Bottom Layer w10: U1.13 3635,4645 v2(3685,4695)
NetR15_1: R15.1 U3.1 | length 280.4
  Top Layer w10: R15.1@4105,4610.04 4105,4671.81 4133.19,4700 4133.19,4712.73 4135.46,4715 4135.46,4810.46 v2(4145,4820)
  Bottom Layer w10: v2(4145,4820) 4168.7,4820 U3.1
NetR17_1: R17.1 U3.2 | length 291.5
  Top Layer w10: v2@4175,4785 4175,4665.04 4230,4610.04
  Bottom Layer w10: v2@4175,4785 4192.99,4785 4240,4832.01 U3.2
  other v2: 4170,4785
NetR18_1: R18.1 U3.14 | length 239.4
  Top Layer w10: v2(4190,4580) 4224,4580 4241.32,4597.32 4327.28,4597.32 R18.1
  Bottom Layer w10: v2(4190,4580) U3.14
NetR19_1: R19.1 U3.13 | length 325.3
  Top Layer w10: v2(4240,4680) 4415.04,4680 R19.1@4485,4610.04
  Bottom Layer w10: U3.13 v2(4240,4680)
NetR24_2: R24.2 R26.1 U4.4 | length 279.9
  Top Layer w10: U4.4 3334.15,4359.69 3355.83,4381.37 3355.83,4414.66 3366.18,4425 3416.5,4425 R26.1 R24.2
NetR25_2: R25.2 U4.1 | length 111.2
  Top Layer w10: U4.1 3380,4223.23 R25.2
RAIL10: R1.2 R2.1 U1.5 U1.7 U1.9 U1.11 U3.5 U3.7 U3.9 U3.11 | length 2304.2
  Top Layer w10: v2(3345,4815) 3534.7,4815 3544.96,4825.27 3684.28,4825.27 3704.28,4845.27 3745.72,4845.27 v2(3795.99,4795) ; v2(3930,4830) 3939.01,4830 3954.28,4845.27 3995.72,4845.27 4010.99,4830 v2(4060,4830)
  Bottom Layer w10: v2(3345,4815) 3345,4761.5 3397.01,4761.5 R2.1@3405,4753.5 ; U1.11 3735,4680 ; U1.5 3785,4800 3795,4790 3865,4790 3885,4810 U1.7 3913.7,4846.3 v2(3930,4830) ; v2(3795.99,4795) 3795.99,4775.99 3793.5,4773.5 3773.2,4773.5 3735,4735.31 3735,4680 ; U1.9 3835,4675.31 3796.8,4713.5 3768.5,4713.5 3735,4680 ; v2(4060,4830) 4114.69,4830 4168.51,4883.81 4371.19,4883.81 4390,4865 4410,4885 4457.48,4885 ; U3.11 4340,4640.31 4428.19,4728.5 4438.5,4728.5 4490,4780 ; U3.9 4440,4637.99 4490,4687.99 4490,4780 ; 4457.48,4883.11 4490,4850.59 U3.7 4490,4780
RAIL+: C1.1 C2.1 C6.1 C12.2 D2.C D4.C D8.C IC1.6 IC2.6 IC3.6 Q1.D Q2.D Q3.D Q4.D Q5.D Q6.D Q7.D Q8.D Q9.D Q10.D Q11.D Q12.D Q13.D Q14.D Q15.D Q16.D Q17.D Q18.D Q19.D Q20.D Q21.D Q22.D Q23.D Q24.D Q25.D Q26.D Q27.D Q28.D R22.1 R24.1 R25.1 U4.2 | length 7907.6
  Top Layer w10: U4.2 R24.1@3383.82,4320.31 ; v2(3310,4160) 3311.5,4158.5 R25.1 3383.5,4158.5 3411.69,4186.69 3411.69,4240 ; R24.1 3388.5,4270.32 3411.69,4247.14 3411.69,4240 ; C12.2 3518.5,4240 3411.69,4240
  Top Layer w20: v1(2270,3820) Q8.D@2367.64,3722.36 ; Q8.D@2352.64,3722.36 Q8.D@2367.64,3722.36 ; Q8.D@2395.98,3722.36 Q8.D@2367.64,3722.36 ; Q18.D@2440,3330 2586.65,3330 Q19.D@2589.02,3327.64 ; C6.1 3039.57,2769.21 D8.C 3066.5,2743.15 IC3.6 ; IC1.6 4772.6,2861.24 4801.36,2890 4909.65,2890 D2.C 5030.43,2769.21 C1.1 ; IC2.6 5003.5,4306.85 D4.C v3(5150,4280.35) 5284.57,4280.35 C2.1 ; Q6.D@5489.02,3327.64 5541.65,3275 Q7.D@5640,3275 ; Q27.D@5490.98,3722.36 5493.62,3725 Q28.D@5635,3725
  Top Layer w200: 2325,3525 5750,3525
  Bottom Layer w20: v3(2270,3330) 2270,3200 2700.79,2769.21 C6.1 ; v2(2665,4385) 2688.5,4408.5 R22.1 ; C2.1 5295,4185 5346.5,4133.5 5478.88,4133.5 5497.38,4115 5515,4115 5815,3815 v3(5815,3725)
  other v1: 2300,3470 2390,3470 2480,3470 2570,3470 2660,3470 2750,3470 2840,3470 2930,3470 3020,3470 3110,3470 3200,3470 3290,3470 3380,3470 3470,3470 3560,3470 3650,3470 3740,3470 3830,3470 4250,3470 4340,3470 4430,3470 4520,3470 4610,3470 4700,3470 4790,3470 4880,3470 4970,3470 5060,3470 5150,3470 5240,3470 5330,3470 5420,3470 5510,3470 5600,3470 5690,3470 5780,3470 2345,3525 2435,3525 2525,3525 2615,3525 2705,3525 2795,3525 2885,3525 2975,3525 3065,3525 3155,3525 3245,3525 3335,3525 3425,3525 3515,3525 3605,3525 3695,3525 3785,3525 3875,3525 4205,3525 4295,3525 4385,3525 4475,3525 4565,3525 4655,3525 4745,3525 4835,3525 4925,3525 5015,3525 5105,3525 5195,3525 5285,3525 5375,3525 5465,3525 5555,3525 5645,3525 5735,3525 2300,3580 2390,3580 2480,3580 2570,3580 2660,3580 2750,3580 2840,3580 2930,3580 3020,3580 3110,3580 3200,3580 3290,3580 3380,3580 3470,3580 3560,3580 3650,3580 3740,3580 3830,3580 4250,3580 4340,3580 4430,3580 4520,3580 4610,3580 4700,3580 4790,3580 4880,3580 4970,3580 5060,3580 5150,3580 5240,3580 5335,3580 5420,3580 5510,3580 5600,3580 5685,3580 5780,3580
  other v3: 5815,3275
RAILOUT: OUT.+ Q8.S Q9.S Q10.S Q11.S Q12.S Q15.S Q16.S S1.2 U4.9 | length 2271.2
  Top Layer w10: U4.9 3129.18,4318.54 3155.49,4318.54 3195,4279.02 3195,3975 ; S1.2 3260,4550 v2(3265,4545)
  Top Layer w200: v1@2375,4025 OUT.+@3885,4025
  Bottom Layer w10: v2(3200,4260) 3200,4279.69 3278.5,4358.19 3278.5,4491.19 3265,4504.69 v2(3265,4545)
  other v1: 2295,3940 2455,3940 2615,3940 2775,3940 2935,3940 3095,3940 3255,3940 3415,3940 3575,3940 2375,4020 2535,4020 2695,4020 2855,4020 3015,4020 3175,4020 3335,4020 3495,4020 2295,4100 2455,4100 2615,4100 2775,4100 2935,4100 3095,4100 3255,4100 3415,4100 3575,4100
  other v2: 2375,4180 2535,4180 2695,4180 2855,4180 3015,4180 3175,4180 3495,4180 3655,4180 2615,4260 3255,4260 3735,4260 2615,4420 3575,4420 2535,4500 2795,4580 2875,4660
VREF1: C8.1 C9.1 C10.1 N1.E R5.1 U1.3 U1.6 U3.3 | length 1920.6
  Top Layer w10: v2(3086.34,4495) 3145.96,4495 3159.46,4481.5 3311.8,4481.5 3325.3,4495 3350,4495 v2(3375,4520) ; C8.1@3490,4731.5 C8.1 3481.5,4721.5 v2(3520,4760)
  Bottom Layer w10: C9.1 3024.84,4556.5 v2(3086.34,4495) N1.E ; v2(3375,4520) R5.1 3468.83,4565.32 3508.44,4565.32 3518,4574.89 3518,4717.04 3537.96,4737 ; v2(3520,4760) 3537.96,4742.04 3537.96,4737 ; U1.6 3835,4872.9 3818.95,4888.95 ; C10.1 4060,4801.5 4048.2,4801.5 3960.74,4888.95 3818.95,4888.95 ; C10.1@4120,4756.5 4214.49,4756.5 4290,4832.01 U3.3 ; 3537.96,4737 3632,4737 3685,4790 U1.3 3685,4873.95 3700,4888.95 3818.95,4888.95
VREF2: R5.2 R6.1 U1.4 | length 646.7
  Bottom Layer w10: R5.2 3520,4520 ; R6.1 3563.5,4520 3520,4520 ; U1.4 3735,4795 3660,4720 3545,4720 3535,4710 3535,4535 3520,4520
VREF3: R6.2 R10.1 U1.8 | length 446.6
  Bottom Layer w10: R6.2 3670.31,4521.5 3740,4591.19 3851.78,4591.19 U1.8@3885,4624.41 ; U1.8 U1.8@3885,4624.41 ; R10.1 3885,4613.5 U1.8@3885,4624.41 ; R10.1@3972.5,4531 R10.1@3975,4528.5
VREF4: R10.2 R12.1 U1.10 | length 479.2
  Top Layer w10: v2(3785,4685) v2(3785,4745)
  Bottom Layer w10: U1.10 v2(3785,4685) ; v2(3785,4745) 3832.99,4745 3908.81,4669.18 3908.81,4652.69 R10.2 4032.99,4528.5 R12.1 ; R10.2@3972.5,4594 R10.2@3975,4591.5
VREF5: R12.2 R13.1 U3.6 | length 635.9
  Bottom Layer w10: R12.2 R12.2@4058.35,4591.5 ; R13.1 4062.01,4591.5 R12.2@4058.35,4591.5 ; 4205,4739.5 4204.5,4739.5 4200,4735 ; U3.6 4440,4770 4415,4745 4260,4745 4250,4735 4200,4735 ; R12.2@4058.35,4591.5 4135.7,4668.85 4135.7,4670.7 4200,4735
VREF6: R13.2 R14.1 U3.4 | length 1040.3
  Top Layer w10: v2(4295,4710) 4295,4737.5 4300,4742.5 v2(4300,4785)
  Bottom Layer w10: v2(4295,4710) 4205,4710 4125,4630 R13.2 4125,4590 4152.5,4562.5 4167.19,4562.5 4178.19,4551.5 4201.81,4551.5 4236.49,4586.19 4256.78,4586.19 4263.81,4593.22 4263.81,4661.81 4273.22,4671.21 4306.78,4671.21 4313.81,4664.18 4313.81,4595.6 4323.73,4585.68 4351.18,4585.68 4353.35,4583.5 R14.1 ; v2(4300,4785) 4315,4800 4315,4816.3 U3.4
VREF7: R14.2 R16.1 U3.8 | length 190.3
  Bottom Layer w10: U3.8 4507.8,4646.5 R14.2 4662.99,4646.5 R16.1
VREF8: R16.2 R20.1 U3.10 | length 413.8
  Top Layer w10: v2(4440,4700) 4580,4700 v2(4585,4705)
  Bottom Layer w10: U3.10 4390,4637.99 4440,4687.99 v2(4440,4700) ; v2(4585,4705) 4658.5,4705 R16.2 R20.1
pads on no net: IC1.1 IC2.1 IC3.1 S1.0 S1.1 U2.3 U4.8
copper on no net: | length 10.7
  Top Layer w10: 3231.15,4324.5 3235.5,4324.5 3240,4320
  other v4: 2460,2740 5625,2740
  other v5: 2460,4305 5620,4305

## Polygon pours and split planes (outlines as drawn)
GND on Bottom Layer "GND_POUR" (solid, pour order 11): 2275,4190 2275,4025 2275,2875.14 2284.95,2825.13 2292.07,2807.93 2600,2500 5480,2500 5535,2500 5780,2745 5780,4300 5435,4585 2625,4585 2440,4355
BAT1 on Top Layer "BAT1_POUR" (solid, remove dead copper, pour order 18): 4060,3220 4060,2135 4860,2240 5533.23,2500 5701.58,2602.54 5750,2650 5750,3220
BAT3 on Top Layer "BAT3_POUR" (solid, remove dead copper, pour order 16): 4020,3225 4020,2140 3300,2225 2566.48,2500 2536.3,2509.16 2326.34,2649.45 2325,2650 2325,3225
BAT2 on Top Layer "BAT2_POUR" (solid, remove dead copper, pour order 14): 4060,3830 4060,4905 4850,4800 5561.03,4525 5585.8,4516.13 5661.44,4454.06 5711.75,4420.45 5750,4400 5750,3830
RAILOUT on Top Layer "RAIL+_POUR" (solid, remove dead copper, pour order 12): 4020,3825 2325,3825 2325,4386.66 2336.77,4406.29 2367.83,4422.89 2505.27,4505.27 2516.46,4516.46 2537.07,4525 3290,4820 4020,4910
RAIL+ on Top Layer "RAIL+_POUR" (solid, remove dead copper, pour order 19): 2225,3754.77 2225,3348.13 2233.54,3261.46 2240,3255 5850,3255 5850,3795 2240,3795 2230.04,3780.09
BAT3 on Signal Layer 1 "Signal Layer 1-No Net" (solid, pour order 20): 2285,3435 3915,3435 3915,2135 3210,2250 2350,2650 2285,2950
RAILOUT on Signal Layer 1 "Signal Layer 1-No Net" (solid, pour order 17): 2285,3615 3915,3615 3915,4905 3250,4805 2350,4405 2285,4125
BAT2 on Signal Layer 1 "Signal Layer 1-No Net" (solid, pour order 15): 4165,3615 5795,3615 5790,4180 5670,4450 5025,4750 4165,4900
BAT1 on Signal Layer 1 "Signal Layer 1-No Net" (solid, pour order 13): 4165,3435 4165,2150 5025,2300 5725,2650 5800,2930 5795,3435
RAIL+ on Internal Plane 1 (split plane): 265 vertices, not listed, extent 2229.67,2138.79 5849.67,4908.78

## Keep-outs
Keep-Out Layer:
  the board outline again, w5

## Other copper
Top Layer:
  rectangle net BAT2: 4240,3830 4385,4025
  rectangle net BAT2: 4465,3830 4620,3975
  rectangle net BAT2: 4710,3830 4855,4010
  rectangle net BAT2: 4945,3830 5090,4000
  rectangle net BAT2: 5180,3830 5325,3990
  rectangle net BAT2: 5415,3830 5560,4000
  rectangle net BAT2: 5650,3830 5795,4020
  rectangle net RAILOUT: 3770,3830 3915,4035
  rectangle net RAILOUT: 3065,3830 3210,4000
  rectangle net RAILOUT: 3535,3830 3680,4010
  rectangle net RAILOUT: 3300,3830 3445,3985
  rectangle net RAILOUT: 2830,3830 2975,4030
  rectangle net RAILOUT: 2595,3830 2740,3965
  rectangle net RAILOUT: 2360,3830 2505,4025
  rectangle net BAT3: 3695,3025 3840,3220
  rectangle net BAT3: 2990,3050 3135,3220
  rectangle net BAT3: 2755,3065 2900,3220
  rectangle net BAT3: 2520,3045 2665,3220
  rectangle net BAT3: 2285,2925 2430,3220
  rectangle net BAT3: 3225,3080 3370,3220
  rectangle net BAT1: 5575,3040 5720,3220
  rectangle net BAT1: 5340,3025 5485,3220
  rectangle net BAT1: 5105,2990 5250,3220
  rectangle net BAT1: 4870,3050 5015,3220
  rectangle net BAT1: 4635,3010 4780,3220
  rectangle net BAT1: 4400,3010 4545,3220
  rectangle net BAT1: 4165,2930 4310,3220
  rectangle net BAT3: 3460,3050 3605,3220
  rectangle net RAIL+: 2325,3255 5770,3795
  pour cut-out: 4750.79,2711.5 4750.79,2668.5 4869.21,2668.5 4869.21,2711.5
  pour cut-out: 3215.79,2711.5 3215.79,2668.5 3334.21,2668.5 3334.21,2711.5
  pour cut-out: 3155,4405 3154.28,4404.28 3154.28,4285.65 3274.35,4285.65 3275,4285 3275,4405
  pour cut-out: 4750.79,4381.5 4750.79,4338.5 4869.21,4338.5 4869.21,4381.5

## Silkscreen, mask and mechanical layers (free items; w line width, h text height)
Top Overlay:
  lines w5: 2353.24,4439.69 cw(c4039.34,1773.03) 5725.45,4439.69 ; 2353.56,4440.44 ccw(c2401.66,4364.37) 2314.27,4385.9 ccw(c5814.67,3523.79) 2314.27,2661.67 ccw(c2401.66,2683.2) 2353.56,2607.13 ccw(c4039.67,5273.79) 5725.78,2607.13 ccw(c5677.68,2683.2) 5765.07,2661.67 ccw(c2264.67,3523.79) 5765.07,4385.9 ccw(c5677.68,4364.37) 5725.78,4440.44
  lines w10: 3530,4730 3485,4775 ; 3530,4820 3485,4775 ; 3535,4775 3485,4775 ; 3900,4775 4115,4775 ; 4540,4775 4755,4775
  text "F" at 3465,4795 h60
  text "E" at 4560,4795 h60
Bottom Overlay:
  lines w5: 2314.27,2661.67 cw(c5814.67,3523.79) 2314.27,4385.9 cw(c2401.66,4364.37) 2353.56,4440.44 cw(c4039.67,1773.79) 5725.79,4440.44 cw(c5677.68,4364.37) 5765.07,4385.9 cw(c2264.67,3523.79) 5765.07,2661.67 cw(c5677.68,2683.2) 5725.78,2607.13 cw(c4039.67,5273.79) 2353.56,2607.13
  text "Matthew Griessler" at 4260,2295 h60
  text "Power Merge Board V2" at 4320,2240 h60
  text "February 2015" at 4190,2175 h60